# Altium PCB USB-C-SMD_TYPE-C-USB-17_2021-08-31.pcbdoc
Units mm, origin at the board's own origin, x right, y up, seen from the top; angles counter-clockwise.
Board outline 38.56 x 34.28 mm, 2 copper layers (Top Layer, Bottom Layer); 1 components, 0 nets, 18 pads, 0 vias.
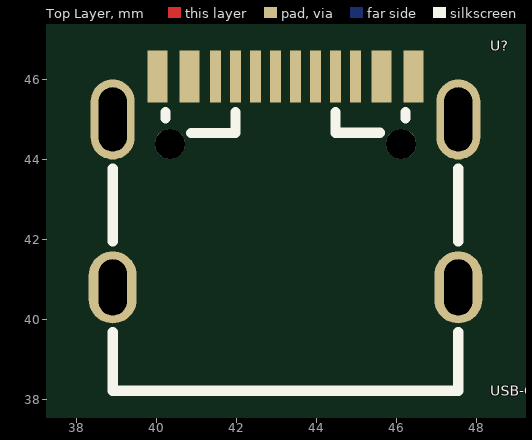
[diagram p0: Top Layer view]
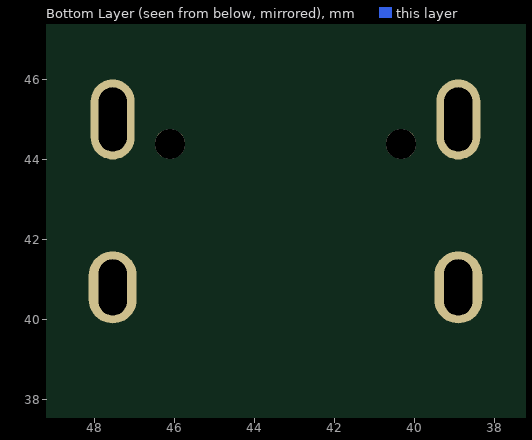
[diagram p1: Bottom Layer view, seen from below]

## Layer stack, top to bottom
Top Layer: signal copper (thickness not stored)
Dielectric: dielectric 0.32, FR-4, Dk 4.8
Bottom Layer: signal copper (thickness not stored)

## Board outline
63.961,25.4 25.4,25.4 25.4,59.682 63.961,59.682

## Components (designator, comment, footprint, x,y, rotation, side; value= is the part's Value field where it differs from the comment)
U? "USB-C-SMD_TYPE-C-USB-17" USB-C-SMD_TYPE-C-USB-17 43.22,42.414 r0 top

## Footprints (in the part's own frame and the unit in brackets; to place one, negate y for a bottom-side part, rotate by r counter-clockwise, add the part's x,y. Pads: shape width x height; smd on the part's side, far side on the other; paste and mask are expansions set on the pad)
USB-C-SMD_TYPE-C-USB-17 [mm]
  oval 1.2x1.8 hole 0.7 slot 1.4 at 90 deg: 0(-4.32,-1.604) 0(4.32,-1.604)
  oval 1.1x2 hole 0.7 slot 1.6 at 90 deg: 0(-4.32,2.596) 0(4.32,2.596)
  rect 0.5x1.3 smd: A1(-3.2,3.663) A4(-2.4,3.663) A9(2.4,3.663) A12(3.2,3.663)
  rect 0.28x1.3 smd: A5(-1.25,3.663) A6(-0.25,3.663) A7(0.25,3.663) A8(1.25,3.664) B5(1.75,3.663) B6(0.75,3.663) B7(-0.75,3.663) B8(-1.75,3.664)
  round 0.75 hole 0.75 unplated: ""(-2.89,1.986) ""(2.89,1.986)
  silkscreen extent -4.32,-4.19 4.32,2.78

## Nets (pads, with @x,y where several pads share a name; then routed paths per layer and width w, separated by ;. In a path a pad name is that pad's centre, name@x,y a point inside that pad or via, vN(x,y) a via of type N, cw(c..) or ccw(c..) an arc to the next point about the centre after c; other vN are vias at no path point)
pads on no net: U?. U?.0 U?.A1 U?.A4 U?.A5 U?.A6 U?.A7 U?.A8 U?.A9 U?.A12 U?.B5 U?.B6 U?.B7 U?.B8

## Silkscreen, mask and mechanical layers (free items; w line width, h text height)
Document:
  lines w0.003: 44.655,42.516 44.706,42.566